# Altium PCB sigjumper-top.PcbDoc (part 5 of 5)
Units mil, origin at the board's own origin, x right, y up, seen from the top; angles counter-clockwise.
Board outline 7874.02 x 2559.06 mil, 14 copper layers (TOP, P1(GND), S1(V), P2(GND), S2(H), P3(GND), S3(V12/V2V5), S4(VDDR), P4(GND), S5(V), P5(GND), S6(H), P6(GND), BOT), stack 115.1 mil thick; 22 components, 186 nets, 824 pads, 732 vias.
Unrouted connection lines stored in the file: 341.
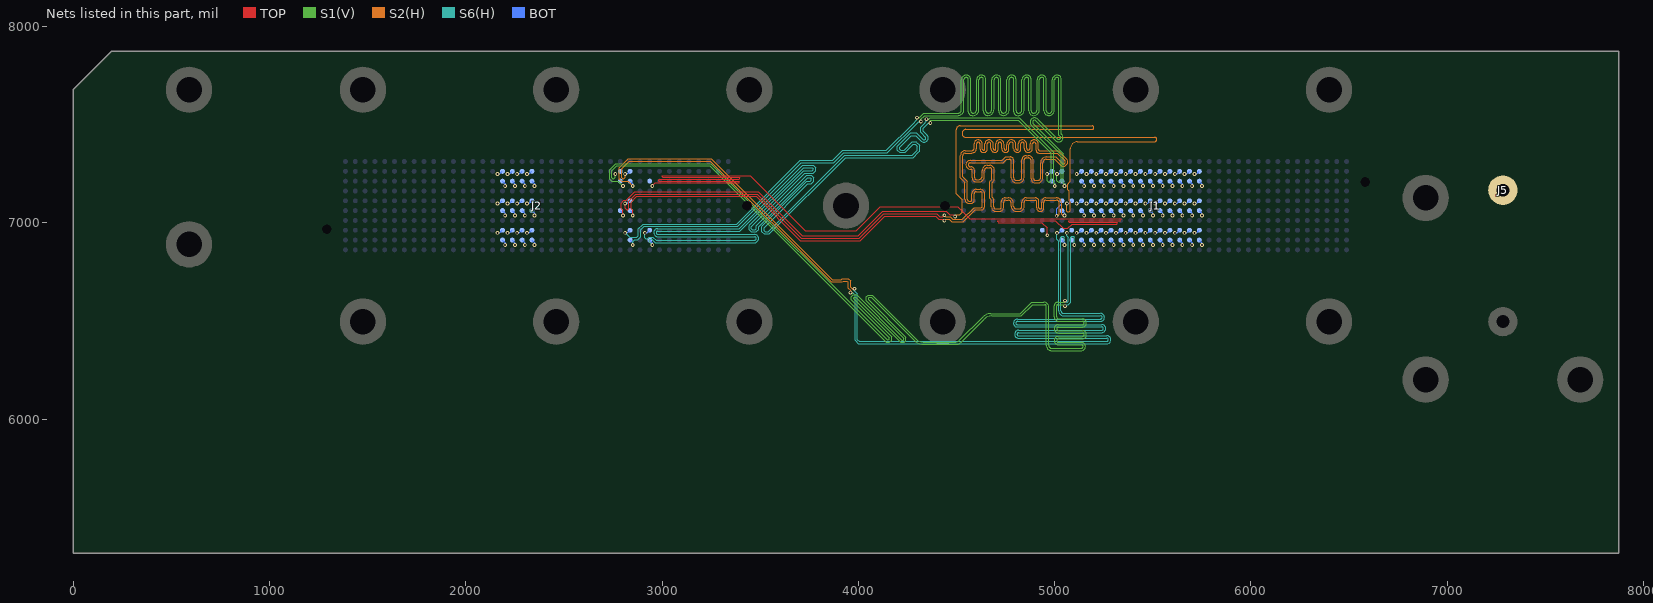
[diagram p17: the nets of this part, all layers, seen from the top]

## Via types
v1: diameter 19, hole 10, TOP to BOT, tented both sides, 732 vias

## Nets (pads, with @x,y where several pads share a name; then routed paths per layer and width w, separated by ;. In a path a pad name is that pad's centre, name@x,y a point inside that pad or via, vN(x,y) a via of type N, cw(c..) or ccw(c..) an arc to the next point about the centre after c; other vN are vias at no path point) (continued)
IL1.SDR.G13.D0_P: J1.285 J2.285 | length 5760.8
  TOP w4: v1(2800.7,7036.61) 2800.7,7061.3 2792,7070 2792,7100.13 2805.7,7113.83 2816.89,7113.83 2861.06,7158 3489.88,7158 3704.88,6943 3714.88,6933 3999.97,6933 4009.97,6943 4124.97,7058 4447,7058 4465,7040 4485,7040 v1(4493,7032)
  S2(H) w4: v1(4493,7032) 4501,7040 4516.97,7040 4530,7053.03 4530,7116.97 4498.49,7148.49 4498.49,7473.42 cw(c4518.06,7473.42) 4518.06,7493 5192,7493 cw(c5192,7485) 5200,7485 cw(c5190,7485) 5190,7475 4548,7475 ccw(c4548,7455) 4528,7455 ccw(c4548,7455) 4548,7435 5510,7435 cw(c5510,7425) 5520,7425 cw(c5507,7425) 5507,7412 5115,7412 ccw(c5115,7377) 5080,7377 5080,7210.06 5066.49,7196.54 5066.49,7168.51 5070,7165 5073,7162 5073,7111.8 5080,7104.8 5080,7060 5075,7055 5065,7055 5061.81,7058.19 v1(5061.81,7098.11)
  BOT w4: J2.285@2787.21,7061.61 2800.71,7048.11 v1(2800.7,7036.61) ; v1(5061.81,7098.11) 5073.31,7098.11 J1.285@5086.81,7111.61
IL1.SDR.G13.D1_N: J1.289 J2.289 | length 5734
  S1(V) w4: v1(2762.2,7248.11) 2762.2,7232.2 2755,7225 2750,7225 2745,7230 2745,7265 2769,7289 3239.94,7289 3244.03,7289 4142.03,6391 4158,6391 4169,6402 4169,6419.14 3975.43,6612.71 3975.43,6616.95 3979.48,6621 3985.53,6621 4216.12,6390.41 4233.13,6390.41 4242.28,6399.56 4242.28,6416.57 ; 4242.28,6416.57 4052.2,6606.65 4052.2,6616.55 4055.03,6619.38 4064.93,6619.38 4286.14,6398.17 ccw(c4330,6442.02) 4330,6380 4495.69,6380 ccw(c4495.69,6419.31) 4523.49,6391.51 4640.69,6508.72 cw(c4680,6469.4) 4680,6525 4830,6525 4888,6583 4949.97,6583 cw(c4949.97,6574.97) 4958,6574.97 4958,6375 ccw(c4985,6375) 4985,6348 5135,6348 ccw(c5135,6370) 5157,6370 ccw(c5137,6370) 5137,6390 5020,6390 cw(c5020,6400) 5010,6400 cw(c5018,6400) 5018,6408 5140,6408 ccw(c5140,6430) 5162,6430 ccw(c5142,6430) 5142,6450 5020,6450 cw(c5020,6460) 5010,6460 cw(c5018,6460) 5018,6468 5140,6468 ccw(c5140,6490) 5162,6490 ccw(c5142,6490) 5142,6510 5020,6510 cw(c5020,6520) 5010,6520 5010,6578 cw(c5015,6578) 5015,6583 5044.54,6583 v1(5053,6574.54)
  S6(H) w4: v1(5053,6574.54) 5061,6582.54 5069.51,6582.54 5082.12,6595.15 5082.12,6924.73 5087.12,6929.73 5097.12,6929.73 5100.31,6926.54 v1(5100.31,6886.61)
IL1.SDR.G13.D1_P: J1.288 J2.288 | length 5750.1
  S1(V) w4: v1(2800.7,7186.61) 2777.32,7210 2745,7210 2733,7222 2733,7269.97 2764.03,7301 3244.91,7301 3249,7301 4147,6403 4153,6403 4157,6407 4157,6414.17 3963.43,6607.74 3963.43,6621.92 3974,6632.49 3974.51,6633 3990.5,6633 3991.01,6632.49 4221.09,6402.41 4228.16,6402.41 4230.28,6404.53 4230.28,6411.6 4040.2,6601.68 4040.2,6616.55 4040.2,6621.52 4050.06,6631.38 4069.9,6631.38 4294.63,6406.65 ccw(c4330,6442.02) 4330,6392 4495.69,6392 ccw(c4495.69,6419.31) 4514.99,6399.99 4635.72,6520.72 cw(c4675.03,6481.4) 4675.03,6537 4825.03,6537 4883.03,6595 4945,6595 cw(c4945,6570) 4970,6570 4970,6375 ccw(c4985,6375) 4985,6360 5135,6360 ccw(c5135,6370) 5145,6370 ccw(c5137,6370) 5137,6378 5020,6378 cw(c5020,6400) 4998,6400 cw(c5018,6400) 5018,6420 5140,6420 ccw(c5140,6430) 5150,6430 ccw(c5142,6430) 5142,6438 5020,6438 cw(c5020,6460) 4998,6460 cw(c5018,6460) 5018,6480 5140,6480 ccw(c5140,6490) 5150,6490 ccw(c5142,6490) 5142,6498 5020,6498 cw(c5020,6520) 4998,6520 4998,6578 cw(c5015,6578) 5015,6595 5045.46,6595 v1(5053,6602.54)
  S6(H) w4: v1(5053,6602.54) 5061,6594.54 5064.54,6594.54 5070.12,6600.12 5070.12,6924.88 5061.81,6933.19 v1(5061.81,6948.11)
IL1.SDR.G13.D2_N: J1.293 J2.293 | length 5810.6
  S1(V) w4: v1(4298.49,7534.8) 4309.8,7534.8 4333,7558 4508,7558 ccw(c4508,7575) 4525,7575 4525,7727 cw(c4550,7727) 4550,7752 cw(c4550,7730) 4572,7730 4572,7571 ccw(c4585,7571) 4585,7558 ccw(c4585,7575) 4602,7575 4602,7727 cw(c4627,7727) 4627,7752 cw(c4627,7730) 4649,7730 4649,7571 ccw(c4662,7571) 4662,7558 ccw(c4662,7575) 4679,7575 4679,7727 cw(c4704,7727) 4704,7752 cw(c4704,7730) 4726,7730 4726,7571 ccw(c4739,7571) 4739,7558 ccw(c4739,7575) 4756,7575 4756,7727 cw(c4781,7727) 4781,7752 cw(c4781,7730) 4803,7730 4803,7571 ccw(c4816,7571) 4816,7558 ccw(c4816,7575) 4833,7575 4833,7727 cw(c4858,7727) 4858,7752 cw(c4858,7730) 4880,7730 4880,7571 ccw(c4893,7571) 4893,7558 ccw(c4893,7575) 4910,7575 4910,7727 cw(c4935,7727) 4935,7752 cw(c4935,7730) 4957,7730 4957,7571 ccw(c4970,7571) 4970,7558 4971.87,7558 ccw(c4971.87,7573.13) 4987,7573.13 4987,7727 cw(c5012,7727) 5012,7752 cw(c5012,7730) 5034,7730 5034,7451.51 5036.11,7449.4 cw(c5020.56,7433.84) 5036.11,7418.28 cw(c5020.56,7433.84) 5005,7418.28 4904.14,7519.14 ccw(c4897.07,7512.07) 4890,7519.14 ccw(c4897.07,7512.07) 4890,7505 5044.29,7350.71 5044.29,7204.14 5050.31,7198.11 v1(5050.31,7186.61)
  S6(H) w4: v1(2812.2,6948.11) 2835.59,6924.73 2871.76,6924.73 2880,6932.97 2880,6967.97 2901.51,6989.49 2905.03,6993 3380,6993 3704,7317 3869.12,7317 3920.12,7368 4143,7368 4279,7504 4298.49,7523.49 v1(4298.49,7534.8)
  BOT w4: v1(2812.2,6948.11) 2823.71,6948.11 J2.293@2837.21,6961.61 ; J1.293@5036.81,7211.61 5050.31,7198.11 v1(5050.31,7186.61)
IL1.SDR.G13.D2_P: J1.292 J2.292 | length 5803.3
  S1(V) w4: v1(4318.28,7515) 4318.28,7526.31 4337.97,7546 4508,7546 ccw(c4508,7575) 4537,7575 4537,7727 cw(c4550,7727) 4550,7740 cw(c4550,7730) 4560,7730 4560,7566.03 ccw(c4580.03,7566.03) 4580.03,7546 4585,7546 ccw(c4585,7575) 4614,7575 4614,7727 cw(c4627,7727) 4627,7740 cw(c4627,7730) 4637,7730 4637,7569 ccw(c4660,7569) 4660,7546 ccw(c4660,7577) 4691,7577 4691,7727 cw(c4704,7727) 4704,7740 cw(c4704,7730) 4714,7730 4714,7571 ccw(c4739,7571) 4739,7546 ccw(c4739,7575) 4768,7575 4768,7727 cw(c4781,7727) 4781,7740 cw(c4781,7730) 4791,7730 4791,7566.03 ccw(c4811.03,7566.03) 4811.03,7546 4816,7546 ccw(c4816,7575) 4845,7575 4845,7727 cw(c4858,7727) 4858,7740 cw(c4858,7730) 4868,7730 4868,7571 ccw(c4893,7571) 4893,7546 ccw(c4893,7575) 4922,7575 4922,7727 cw(c4935,7727) 4935,7740 cw(c4935,7730) 4945,7730 4945,7571 ccw(c4970,7571) 4970,7546 4971.82,7546 ccw(c4971.82,7573.18) 4999,7573.18 4999,7727 cw(c5012,7727) 5012,7740 cw(c5012,7730) 5022,7730 5022,7446.54 5027.63,7440.91 cw(c5020.56,7433.84) 5027.63,7426.77 cw(c5020.56,7433.84) 5013.49,7426.77 4912.63,7527.63 ccw(c4897.07,7512.07) 4881.51,7527.63 ccw(c4897.07,7512.07) 4881.51,7496.51 5032.29,7345.74 5032.29,7209.29 5028,7205 5020,7205 5011.81,7213.19 v1(5011.81,7248.11)
  S6(H) w4: v1(2850.7,6886.61) 2850.7,6902.52 2860.91,6912.73 2876.73,6912.73 2892,6928 2892,6963 2910,6981 3384.97,6981 3708.97,7305 3874.09,7305 3892.04,7322.96 3918.06,7348.97 3925.09,7356 4147.97,7356 4306.97,7515 v1(4318.28,7515)
  BOT w4: J2.292@2837.21,6911.61 2850.71,6898.11 v1(2850.7,6886.61) ; v1(5011.81,7248.11) 5023.31,7248.11 J1.292@5036.81,7261.61
IL1.SDR.G13.D3_N: J1.296 J2.296 | length 5765.5
  TOP w4: v1(2812.2,7098.11) 2812.2,7072.8 2820,7065 2825,7065 2830,7070 2830,7109.97 2866.03,7146 3484.91,7146 3699.91,6931 3709.91,6921 4004.94,6921 4014.94,6931 4128.94,7045 4400,7045 4415,7030 4430,7030 v1(4438,7038)
  S2(H) w4: v1(4438,7038) 4446,7030 4466.97,7030 4480.68,7016.29 4529.32,7016.29 4590.03,7077 4625,7077 ccw(c4625,7083) 4631,7083 4631,7148 ccw(c4621,7148) 4621,7158 4600,7158 ccw(c4600,7148) 4590,7148 4590,7115 cw(c4573,7115) 4573,7098 4565,7098 cw(c4565,7120) 4543,7120 4543,7205 4520,7228 4520,7342 cw(c4545,7342) 4545,7367 4577,7367 ccw(c4577,7380) 4590,7380 4590,7402 cw(c4610,7402) 4610,7422 cw(c4610,7400) 4632,7400 4632,7375 ccw(c4637,7375) 4637,7370 4640,7370 ccw(c4640,7375) 4645,7375 4645,7402 cw(c4665,7402) 4665,7422 cw(c4665,7400) 4687,7400 4687,7378 ccw(c4695,7378) 4695,7370 ccw(c4695,7375) 4700,7375 4700,7402 cw(c4720,7402) 4720,7422 cw(c4720,7400) 4742,7400 4742,7378 ccw(c4750,7378) 4750,7370 ccw(c4750,7375) 4755,7375 4755,7397 cw(c4780,7397) 4780,7422 cw(c4780,7400) 4802,7400 4802,7378 ccw(c4810,7378) 4810,7370 ccw(c4810,7375) 4815,7375 4815,7402 cw(c4835,7402) 4835,7422 cw(c4835,7400) 4857,7400 4857,7378 ccw(c4865,7378) 4865,7370 ccw(c4865,7380) 4875,7380 4875,7402 cw(c4895,7402) 4895,7422 cw(c4895,7400) 4917,7400 4917,7373.48 ccw(c4923.48,7373.48) 4923.48,7367 5017.97,7367 5059.49,7325.49 ; v1(5050.31,7036.61) 5041.39,7036.61 5035,7043 5035,7100 ccw(c5008,7100) 5008,7127 4955,7127 ccw(c4955,7105) 4933,7105 4933,7075 cw(c4928,7075) 4928,7070 4925,7070 cw(c4925,7075) 4920,7075 4920,7107 ccw(c4900,7107) 4900,7127 4855,7127 ccw(c4855,7105) 4833,7105 4833,7083 cw(c4820,7083) 4820,7070 4805,7070 cw(c4805,7085) 4790,7085 4790,7100 ccw(c4763,7100) 4763,7127 4749.06,7127 ccw(c4749.06,7105.94) 4728,7105.94 4728,7078 cw(c4720,7078) 4720,7070 4700,7070 cw(c4700,7080) 4690,7080 4690,7120 4680.99,7129.01 4680.99,7204.01 4692,7215.03 4692,7270 ccw(c4670,7270) 4670,7292 4657,7292 ccw(c4657,7265) 4630,7265 4630,7235 cw(c4615,7235) 4615,7220 4600,7220 cw(c4600,7228) 4592,7228 4592,7265 ccw(c4572,7265) 4572,7285 4570,7285 cw(c4570,7295) 4560,7295 cw(c4570,7295) 4570,7305 4737,7305 4755,7323 4769,7323 cw(c4769,7313) 4779,7313 4779,7230 ccw(c4806,7230) 4806,7203 4815,7203 ccw(c4815,7233) 4845,7233 4845,7320 cw(c4855,7320) 4855,7330 4865,7330 cw(c4865,7315) 4880,7315 4880,7225 ccw(c4902,7225) 4902,7203 4915,7203 ccw(c4915,7228) 4940,7228 4940,7305 cw(c4958,7305) 4958,7323 4999.77,7323 5028.89,7293.89 ccw(c5044.44,7309.44) 5060,7293.89 ccw(c5044.44,7309.44) 5060,7325
  BOT w4: v1(2812.2,7098.11) 2823.71,7098.11 J2.296@2837.21,7111.61 ; J1.296@5036.81,7061.61 5050.31,7048.11 v1(5050.31,7036.61)
IL1.SDR.G13.D3_P: J1.295 J2.295 | length 5774.6
  TOP w4: v1(2850.7,7036.61) 2850.7,7061.3 2842,7070 2842,7105 2871,7134 3479.94,7134 3694.94,6919 3704.94,6909 4009.91,6909 4019.91,6919 4133.91,7033 4395.03,7033 4410.03,7018 4430,7018 v1(4438,7010)
  S2(H) w4: v1(4438,7010) 4446,7018 4462,7018 4470,7010 4475.71,7004.29 4534.29,7004.29 4595,7065 4625,7065 ccw(c4625,7083) 4643,7083 4643,7148 ccw(c4621,7148) 4621,7170 4600,7170 ccw(c4600,7148) 4578,7148 4578,7115 cw(c4573,7115) 4573,7110 4565,7110 cw(c4565,7120) 4555,7120 4555,7209.97 4532,7232.97 4532,7342 cw(c4545,7342) 4545,7355 4577,7355 ccw(c4577,7380) 4602,7380 4602,7402 cw(c4610,7402) 4610,7410 cw(c4610,7400) 4620,7400 4620,7375 ccw(c4637,7375) 4637,7358 4640,7358 ccw(c4640,7375) 4657,7375 4657,7402 cw(c4665,7402) 4665,7410 cw(c4665,7400) 4675,7400 4675,7378 ccw(c4695,7378) 4695,7358 ccw(c4695,7375) 4712,7375 4712,7402 cw(c4720,7402) 4720,7410 cw(c4720,7400) 4730,7400 4730,7378 ccw(c4750,7378) 4750,7358 ccw(c4750,7375) 4767,7375 4767,7397 cw(c4780,7397) 4780,7410 cw(c4780,7400) 4790,7400 4790,7378 ccw(c4810,7378) 4810,7358 ccw(c4810,7375) 4827,7375 4827,7402 cw(c4835,7402) 4835,7410 cw(c4835,7400) 4845,7400 4845,7378 ccw(c4865,7378) 4865,7358 ccw(c4865,7380) 4887,7380 4887,7402 cw(c4895,7402) 4895,7410 cw(c4895,7400) 4905,7400 4905,7368.51 ccw(c4918.51,7368.51) 4918.51,7355 5013,7355 5051,7317 ; v1(5010,7035) 5015,7035 5023,7043 5023,7100 ccw(c5008,7100) 5008,7115 4955,7115 ccw(c4955,7105) 4945,7105 4945,7075 cw(c4928,7075) 4928,7058 4925,7058 cw(c4925,7075) 4908,7075 4908,7107 ccw(c4900,7107) 4900,7115 4855,7115 ccw(c4855,7105) 4845,7105 4845,7083 cw(c4820,7083) 4820,7058 4805,7058 cw(c4805,7085) 4778,7085 4778,7100 ccw(c4763,7100) 4763,7115 4750.04,7115 ccw(c4750.04,7104.96) 4740,7104.96 4740,7078 cw(c4720,7078) 4720,7058 4700,7058 cw(c4700,7080) 4678,7080 4678,7115.03 4668.99,7124.04 4668.99,7208.99 4672.5,7212.5 4680,7220 4680,7270 ccw(c4670,7270) 4670,7280 4657,7280 ccw(c4657,7265) 4642,7265 4642,7235 cw(c4615,7235) 4615,7208 4600,7208 cw(c4600,7228) 4580,7228 4580,7265 ccw(c4572,7265) 4572,7273 4570,7273 cw(c4570,7295) 4548,7295 cw(c4570,7295) 4570,7317 4732.03,7317 4750.03,7335 4773.97,7335 cw(c4773.97,7317.97) 4791,7317.97 4791,7230 ccw(c4806,7230) 4806,7215 4815,7215 ccw(c4815,7233) 4833,7233 4833,7320 cw(c4855,7320) 4855,7342 4865,7342 cw(c4865,7315) 4892,7315 4892,7225 ccw(c4902,7225) 4902,7215 4915,7215 ccw(c4915,7228) 4928,7228 4928,7305 cw(c4958,7305) 4958,7335 5004.75,7335 5037.37,7302.37 ccw(c5044.44,7309.44) 5051.51,7302.37 ccw(c5044.44,7309.44) 5051.51,7316.51
  BOT w4: J2.295@2837.21,7061.61 2850.71,7048.11 v1(2850.7,7036.61) ; v1(5010,7035) 5010,7069.88 5036.81,7096.69 J1.295@5036.81,7111.61
IL1.SDR.G13.D4_N: J1.299 J2.299 | length 5797.5
  S2(H) w4: v1(2812.2,7248.11) 2812.2,7232.2 2805,7225 2800,7225 2795,7230 2795,7275 2833.29,7313.29 3246.71,7313.29 3861.73,6698.27 3919.05,6698.27 3923.49,6702.71 3943.56,6702.71 3948,6698.27 3948,6667 3960,6655 v1(3960,6643.69)
  S6(H) w4: v1@3956.31,6648.69 v1@3961.31,6643.69 ; v1(3960,6643.69) v1@3961.31,6643.69 ; v1(5050.31,6886.61) 5049,6887.92 5049,6925 5044.27,6929.73 5037.12,6929.73 5032.12,6924.73 5032.12,6550.88 ccw(c5045,6550.88) 5045,6538 5233,6538 ; 5234,6538 cw(c5234,6518) 5254,6518 cw(c5233,6518) 5233,6497 4811,6497 ccw(c4811,6488) 4802,6488 ccw(c4809,6488) 4809,6481 5239,6481 ; 5240,6481 cw(c5240,6461) 5260,6461 cw(c5239,6461) 5239,6440 4817,6440 ccw(c4817,6431) 4808,6431 ccw(c4815,6431) 4815,6424 5266,6424 cw(c5266,6404) 5286,6404 cw(c5265,6404) 5265,6383 4000.03,6383 3983,6400.03 3983,6632 3971.31,6643.69 v1@3961.31,6643.69
  BOT w4: v1(2812.2,7248.11) 2823.71,7248.11 J2.299@2837.21,7261.61 ; J1.299@5036.81,6911.61 5050.31,6898.11 v1(5050.31,6886.61)
IL1.SDR.G13.D4_P: J1.298 J2.298 | length 5810.7
  S2(H) w4: v1(2850.7,7186.61) 2827.32,7210 2795,7210 2783,7222 2783,7279.97 2828.32,7325.29 3251.68,7325.29 3866.7,6710.27 3914.08,6710.27 3918.52,6714.71 3948.53,6714.71 3960,6703.24 3960,6671.97 3968.49,6663.49 v1(3979.8,6663.49)
  S6(H) w4: v1(3979.8,6663.49) 3979.8,6652.17 3995,6636.97 3995,6405 4005,6395 5265,6395 ccw(c5265,6404) 5274,6404 ccw(c5266,6404) 5266,6412 4815,6412 cw(c4815,6431) 4796,6431 cw(c4817,6431) 4817,6452 5239,6452 ccw(c5239,6461) 5248,6461 ccw(c5240,6461) 5240,6469 ; v1(5011.81,6948.11) 5011.81,6915.04 5020.12,6906.73 5020.12,6550.88 ccw(c5045,6550.88) 5045,6526 5233,6526 ; 5234,6526 cw(c5234,6518) 5242,6518 cw(c5233,6518) 5233,6509 4811,6509 ccw(c4811,6488) 4790,6488 ccw(c4809,6488) 4809,6469 5239,6469
  BOT w4: J2.298@2837.21,7211.61 2850.71,7198.11 v1(2850.7,7186.61) ; v1(5011.81,6948.11) 5023.31,6948.11 J1.298@5036.81,6961.61
IL1.SDR.G13.D5_N: J1.303 J2.313 | length 5818.7
  S1(V) w4: v1(4347,7527.31) 4358.31,7527.31 4365,7534 4819.03,7534 4994.29,7358.74 4994.29,7204.14 5000.31,7198.11 v1(5000.31,7186.61)
  S6(H) w4: v1(2912.2,6948.11) 2912.2,6922.8 2916.51,6918.49 2926.51,6918.49 2935.03,6927 2953,6927 2970,6910 3470,6910 ccw(c3470,6920) 3480,6920 ccw(c3472,6920) 3472,6928 2980,6928 cw(c2980,6950) 2958,6950 cw(c2977,6950) 2977,6969 3392.03,6969 3563.78,7140.75 3716.03,7293 3769.97,7293 3782,7280.97 3782,7265.03 3769.97,7253 3728,7253 3455,6980 3455,6970 3460,6965 3475,6965 3480,6970 3480,6984.97 3737.03,7242 3759.97,7242 3772,7229.97 3772,7210.03 3759.97,7198 3743,7198 3520,6975 3520,6960 3525,6955 3541.06,6955 3930.06,7344 4274,7344 4300,7370 4300,7390 4290,7400 4280,7400 4238,7358 4210.03,7358 4198,7370.03 4198,7389.06 4265.94,7457 4295.57,7457 4327.37,7425.2 ccw(c4334.44,7432.27) 4341.51,7425.2 ccw(c4335.86,7430.86) 4341.51,7436.51 4318,7460.03 4318,7487 4335.5,7504.5 4347,7516 v1(4347,7527.31)
  BOT w4: v1(2912.2,6948.11) 2923.71,6948.11 J2.313@2937.21,6961.61 ; J1.303@4986.81,7211.61 5000.32,7198.11 v1(5000.31,7186.61)
IL1.SDR.G13.D5_P: J1.302 J2.312 | length 5809.8
  S1(V) w4: v1(4366.8,7507.51) 4366.8,7518.83 4369.97,7522 4814.06,7522 4982.29,7353.77 4982.29,7209.28 4978,7205 4970,7205 4961.81,7213.19 v1(4961.81,7248.11)
  S6(H) w4: v1(2950.7,6886.61) 2935,6902.32 2935,6910 2940,6915 2948.03,6915 2965.03,6898 3470,6898 ccw(c3470,6920) 3492,6920 ccw(c3472,6920) 3472,6940 2980,6940 cw(c2980,6950) 2970,6950 cw(c2977,6950) 2977,6957 3397,6957 3721,7281 3765,7281 3770,7276 3770,7270 3765,7265 3723.03,7265 3446.51,6988.49 3443,6984.97 3443,6965.03 3451.51,6956.51 3455.03,6953 3479.97,6953 3488.49,6961.51 3492,6965.03 3492,6980 3742,7230 3755,7230 3760,7225 3760,7215 3755,7210 3738.03,7210 3511.51,6983.49 3508,6979.97 3508,6955.03 3520.03,6943 3546.03,6943 3935.03,7332 4278.97,7332 4308.49,7361.51 4312,7365.03 4312,7394.97 4308.49,7398.49 4298.49,7408.49 4294.97,7412 4275.03,7412 4233.03,7370 4215,7370 4210,7375 4210,7384.09 4269.91,7444 4291.6,7444 4318.89,7416.72 ccw(c4334.44,7432.27) 4350,7416.72 ccw(c4335.86,7430.86) 4350,7445 4330,7465 4330,7482.03 4355.49,7507.51 v1(4366.8,7507.51)
  BOT w4: J2.312@2937.21,6911.61 2950.71,6898.11 v1(2950.7,6886.61) ; v1(4961.81,7248.11) 4973.32,7248.11 J1.302@4986.81,7261.61
IL1.SDR.G13.D6: J1.318 J2.318 | length 5700.8
  TOP w4: v1(2950.7,7186.61) 2966.42,7202.33 3391.3,7202.33 3393.7,7204.72 3393.7,7208.66 3390.75,7211.61 2984.25,7211.61 2982.28,7213.58 2982.28,7218.19 2985.55,7221.46 3391.73,7221.46 3394.69,7224.41 3394.69,7229.33 3392.72,7231.3 3004.61,7231.3 3001.97,7233.94 3001.97,7237.88 3004.36,7240.27 3449.73,7240.27 3730.15,6959.85 3989.52,6959.85 4111.67,7082 4505,7082 4566.33,7020.67 4915.39,7020.67 4916.77,7019.29 5337.01,7019.29 5339.57,7016.73 5339.57,7013.78 5336.61,7010.83 5073.82,7010.83 5071.85,7008.86 5071.85,7003.94 5073.82,7001.97 5316.93,7001.97 5318.9,7000 5318.9,6995.08 5316.93,6993.11 5088.58,6993.11 5065.94,6970.47 5043.31,6970.47 5002.95,7010.83 4711.61,7010.83 4709.65,7008.86 4709.65,7003.94 4712.6,7000.98 4934.06,7000.98 4961.61,6973.43 4961.61,6935.04 v1(4962.6,6936.02)
JTAG.TCK: J1.215 | length 30.6
  BOT w4: v1(5411.81,7098.11) 5423.31,7098.11 J1.215@5436.81,7111.61
JTAG.TDI: J1.212 | length 30.6
  BOT w4: v1(5411.81,7248.11) 5423.31,7248.11 J1.212@5436.81,7261.61
JTAG.TDO: J1.216 | length 30.6
  BOT w4: J1.216@5436.81,7061.61 5450.31,7048.11 v1(5450.31,7036.61)
JTAG.TMS: J1.213 | length 30.6
  BOT w4: J1.213@5436.81,7211.61 5450.31,7198.11 v1(5450.31,7186.61)
MCLK.C_N: J1.219 | length 30.6
  BOT w3.5: J1.219@5436.81,6911.61 5450.31,6898.11 v1(5450.31,6886.61)
MCLK.C_P: J1.218 | length 30.6
  BOT w3.5: v1(5411.81,6948.11) 5423.31,6948.11 J1.218@5436.81,6961.61
MIB33I.S0: J1.253 | length 30.6
  BOT w4: J1.253@5236.81,7211.61 5250.31,7198.11 v1(5250.31,7186.61)
MIB33I.S1: J1.252 | length 30.6
  BOT w4: v1(5211.81,7248.11) 5223.31,7248.11 J1.252@5236.81,7261.61
MIB33I.S2: J1.256 | length 30.6
  BOT w4: J1.256@5236.81,7061.61 5250.31,7048.11 v1(5250.31,7036.61)
MIB33I.S3: J1.255 | length 30.6
  BOT w4: v1(5211.81,7098.11) 5223.31,7098.11 J1.255@5236.81,7111.61
MIB33I.S4: J1.259 | length 30.6
  BOT w4: J1.259@5236.81,6911.61 5250.31,6898.11 v1(5250.31,6886.61)
MIB33I.S5: J1.258 | length 30.6
  BOT w4: v1(5211.81,6948.11) 5223.31,6948.11 J1.258@5236.81,6961.61
MIB33I.S6: J1.263 | length 30.6
  BOT w4: J1.263@5186.81,7211.61 5200.31,7198.11 v1(5200.31,7186.61)
MIB33I.S7: J1.262 | length 30.6
  BOT w4: v1(5161.81,7248.11) 5173.31,7248.11 J1.262@5186.81,7261.61
MIB33I.S8: J1.266 | length 30.6
  BOT w4: J1.266@5186.81,7061.61 5200.31,7048.11 v1(5200.31,7036.61)
MIB33I.S9: J1.265 | length 30.6
  BOT w4: v1(5161.81,7098.11) 5173.31,7098.11 J1.265@5186.81,7111.61
MIB33I.S10: J1.269 | length 30.6
  BOT w4: J1.269@5186.81,6911.61 5200.31,6898.11 v1(5200.31,6886.61)
MIB33I.S11: J1.268 | length 30.6
  BOT w4: v1(5161.81,6948.11) 5173.31,6948.11 J1.268@5186.81,6961.61
MIB33I.S12: J1.273 | length 30.6
  BOT w4: J1.273@5136.81,7211.61 5150.31,7198.11 v1(5150.31,7186.61)
MIB33I.S13: J1.272 | length 30.6
  BOT w4: v1(5111.81,7248.11) 5123.31,7248.11 J1.272@5136.81,7261.61
MIB33I.S14: J1.276 | length 30.6
  BOT w4: J1.276@5136.81,7061.61 5150.31,7048.11 v1(5150.31,7036.61)
MIB33I.S15: J1.275 | length 30.6
  BOT w4: v1(5111.81,7098.11) 5123.31,7098.11 J1.275@5136.81,7111.61
MIB33I.S16: J1.279 | length 30.6
  BOT w4: J1.279@5136.81,6911.61 5150.31,6898.11 v1(5150.31,6886.61)
MIB33I.S17: J1.278 | length 30.6
  BOT w4: v1(5111.81,6948.11) 5123.31,6948.11 J1.278@5136.81,6961.61
MIB33I.S18: J1.203 | length 30.6
  BOT w4: J1.203@5486.81,7211.61 5500.31,7198.11 v1(5500.31,7186.61)
MIB33I.S19: J1.202 | length 30.6
  BOT w4: v1(5461.81,7248.11) 5473.31,7248.11 J1.202@5486.81,7261.61
MIB33I.S20: J1.206 | length 30.6
  BOT w4: J1.206@5486.81,7061.61 5500.31,7048.11 v1(5500.31,7036.61)
MIB33I.S21: J1.205 | length 30.6
  BOT w4: v1(5461.81,7098.11) 5473.31,7098.11 J1.205@5486.81,7111.61
MIB33I.S22: J1.209 | length 30.6
  BOT w4: J1.209@5486.81,6911.61 5500.31,6898.11 v1(5500.31,6886.61)
MIB33I.S23: J1.208 | length 30.6
  BOT w4: v1(5461.81,6948.11) 5473.31,6948.11 J1.208@5486.81,6961.61
MIB33I.S24: J1.153 | length 30.6
  BOT w4: J1.153@5736.81,7211.61 5750.32,7198.11 v1(5750.31,7186.61)
MIB33I.S25: J1.152 | length 30.6
  BOT w4: v1(5711.81,7248.11) 5723.32,7248.11 J1.152@5736.81,7261.61
MIB33I.S26: J1.156 | length 30.6
  BOT w4: J1.156@5736.81,7061.61 5750.32,7048.11 v1(5750.31,7036.61)
MIB33I.S27: J1.155 | length 30.6
  BOT w4: v1(5711.81,7098.11) 5723.32,7098.11 J1.155@5736.81,7111.61
MIB33I.S28: J1.159 | length 30.6
  BOT w4: J1.159@5736.81,6911.61 5750.32,6898.11 v1(5750.31,6886.61)
MIB33I.S29: J1.158 | length 30.6
  BOT w4: v1(5711.81,6948.11) 5723.32,6948.11 J1.158@5736.81,6961.61
PROG_N: J1.222 | length 30.6
  BOT w4: v1(5361.81,7248.11) 5373.31,7248.11 J1.222@5386.81,7261.61
RSTI_N: J1.223 | length 30.6
  BOT w4: J1.223@5386.81,7211.61 5400.31,7198.11 v1(5400.31,7186.61)
V48BB: J1.225 J1.226 J1.228 J1.229 J1.232 J1.233 J1.235 J1.236 J1.238 J1.239 J1.242 J1.243 J1.245 J1.246 J1.248 J1.249 J5.1 | length 489.5
  BOT w4: v1(5261.81,6948.11) 5273.31,6948.11 J1.248@5286.81,6961.61 ; v1(5261.81,7098.11) 5273.31,7098.11 J1.245@5286.81,7111.61 ; v1(5261.81,7248.11) 5273.31,7248.11 J1.242@5286.81,7261.61 ; J1.249@5286.81,6911.61 5300.31,6898.11 v1(5300.31,6886.61) ; J1.246@5286.81,7061.61 5300.31,7048.11 v1(5300.31,7036.61) ; J1.243@5286.81,7211.61 5300.31,7198.11 v1(5300.31,7186.61) ; v1(5311.81,6948.11) 5323.31,6948.11 J1.238@5336.81,6961.61 ; v1(5311.81,7098.11) 5323.31,7098.11 J1.235@5336.81,7111.61 ; v1(5311.81,7248.11) 5323.31,7248.11 J1.232@5336.81,7261.61 ; J1.239@5336.81,6911.61 5350.31,6898.11 v1(5350.31,6886.61) ; J1.236@5336.81,7061.61 5350.31,7048.11 v1(5350.31,7036.61) ; J1.233@5336.81,7211.61 5350.31,7198.11 v1(5350.31,7186.61) ; v1(5361.81,6948.11) 5373.31,6948.11 J1.228@5386.81,6961.61 ; v1(5361.81,7098.11) 5373.31,7098.11 J1.225@5386.81,7111.61 ; J1.229@5386.81,6911.61 5400.31,6898.11 v1(5400.31,6886.61) ; J1.226@5386.81,7061.61 5400.31,7048.11 v1(5400.31,7036.61)
VIOREF_L_T: J2.175 J2.176 J2.178 J2.179 J2.182 J2.183 J2.185 J2.186 J2.188 J2.189 J2.192 J2.193 J2.195 J2.196 J2.198 J2.199 | length 489.5
  BOT w4: v1(2212.2,7098.11) 2223.71,7098.11 J2.176@2237.21,7111.61 ; v1(2212.2,7248.11) 2223.71,7248.11 J2.179@2237.21,7261.61 ; J2.175@2237.21,7061.61 2250.71,7048.11 v1(2250.7,7036.61) ; J2.178@2237.21,7211.61 2250.71,7198.11 v1(2250.7,7186.61) ; v1(2262.2,6948.11) 2273.71,6948.11 J2.183@2287.21,6961.61 ; v1(2262.2,7098.11) 2273.71,7098.11 J2.186@2287.21,7111.61 ; v1(2262.2,7248.11) 2273.71,7248.11 J2.189@2287.21,7261.61 ; J2.182@2287.21,6911.61 2300.71,6898.11 v1(2300.7,6886.61) ; J2.185@2287.21,7061.61 2300.71,7048.11 v1(2300.7,7036.61) ; J2.188@2287.21,7211.61 2300.71,7198.11 v1(2300.7,7186.61) ; v1(2312.2,6948.11) 2323.71,6948.11 J2.193@2337.21,6961.61 ; v1(2312.2,7098.11) 2323.71,7098.11 J2.196@2337.21,7111.61 ; v1(2312.2,7248.11) 2323.71,7248.11 J2.199@2337.21,7261.61 ; J2.192@2337.21,6911.61 2350.71,6898.11 v1(2350.7,6886.61) ; J2.195@2337.21,7061.61 2350.71,7048.11 v1(2350.7,7036.61) ; J2.198@2337.21,7211.61 2350.71,7198.11 v1(2350.7,7186.61)
VIOREF_R_T: J1.175 J1.176 J1.178 J1.179 J1.182 J1.183 J1.185 J1.186 J1.188 J1.189 J1.192 J1.193 J1.195 J1.196 J1.198 J1.199 | length 489.5
  BOT w4: v1(5511.81,6948.11) 5523.31,6948.11 J1.198@5536.81,6961.61 ; v1(5511.81,7098.11) 5523.31,7098.11 J1.195@5536.81,7111.61 ; v1(5511.81,7248.11) 5523.32,7248.11 J1.192@5536.81,7261.61 ; J1.199@5536.81,6911.61 5550.32,6898.11 v1(5550.31,6886.61) ; J1.196@5536.81,7061.61 5550.31,7048.11 v1(5550.31,7036.61) ; J1.193@5536.81,7211.61 5550.31,7198.12 v1(5550.31,7186.62) ; v1(5561.81,6948.12) 5573.31,6948.12 J1.188@5586.81,6961.61 ; v1(5561.81,7098.11) 5573.31,7098.11 J1.185@5586.81,7111.61 ; v1(5561.81,7248.11) 5573.31,7248.11 J1.182@5586.81,7261.61 ; J1.189@5586.81,6911.61 5600.32,6898.11 v1(5600.31,6886.61) ; J1.186@5586.81,7061.61 5600.31,7048.11 v1(5600.31,7036.61) ; J1.183@5586.81,7211.61 5600.31,7198.11 v1(5600.31,7186.61) ; v1(5611.81,6948.11) 5623.31,6948.11 J1.178@5636.81,6961.61 ; v1(5611.81,7098.11) 5623.31,7098.11 J1.175@5636.81,7111.61 ; J1.179@5636.81,6911.61 5650.32,6898.11 v1(5650.32,6886.61) ; J1.176@5636.81,7061.61 5650.31,7048.11 v1(5650.31,7036.61)
VTTREF_L_T: J2.162 J2.163 J2.165 J2.166 J2.168 J2.169 J2.172 J2.173 | length 244.7
  BOT w4: v1(2162.2,6948.11) 2173.71,6948.11 J2.163@2187.21,6961.61 ; v1(2162.2,7098.11) 2173.71,7098.11 J2.166@2187.21,7111.61 ; v1(2162.2,7248.11) 2173.71,7248.11 J2.169@2187.21,7261.61 ; J2.162@2187.21,6911.61 2200.71,6898.11 v1(2200.7,6886.61) ; J2.165@2187.21,7061.61 2200.71,7048.11 v1(2200.7,7036.61) ; J2.168@2187.21,7211.61 2200.71,7198.11 v1(2200.7,7186.61) ; v1(2212.2,6948.11) 2223.71,6948.11 J2.173@2237.21,6961.61 ; J2.172@2237.21,6911.61 2250.71,6898.11 v1(2250.7,6886.61)
VTTREF_R_T: J1.162 J1.163 J1.165 J1.166 J1.168 J1.169 J1.172 J1.173 | length 244.7
  BOT w4: v1(5611.81,7248.11) 5623.32,7248.11 J1.172@5636.81,7261.61 ; J1.173@5636.81,7211.61 5650.31,7198.12 v1(5650.31,7186.62) ; v1(5661.81,6948.11) 5673.31,6948.11 J1.168@5686.81,6961.61 ; v1(5661.81,7098.11) 5673.31,7098.11 J1.165@5686.81,7111.61 ; v1(5661.81,7248.11) 5673.32,7248.11 J1.162@5686.81,7261.61 ; J1.169@5686.81,6911.61 5700.32,6898.11 v1(5700.31,6886.61) ; J1.166@5686.81,7061.61 5700.31,7048.11 v1(5700.31,7036.61) ; J1.163@5686.81,7211.61 5700.31,7198.11 v1(5700.31,7186.61)
pads on no net: J1.119 J1.122 J1.123 J1.125 J1.126 J1.128 J1.129 J1.132 J1.133 J1.135 J1.136 J1.138 J1.139 J1.142 J1.143 J1.145 J1.146 J1.148 J1.149 J1.319 J1.401 J1.402 J2.39 J2.122 J2.123 J2.125 J2.126 J2.128 J2.129 J2.132 J2.133 J2.135 J2.136 J2.138 J2.139 J2.142 J2.143 J2.145 J2.146 J2.148 J2.149 J2.152 J2.153 J2.155 J2.156 J2.158 J2.159 J2.319 J2.322 J2.323 J2.325 J2.326 J2.328 J2.329 J2.332 J2.333 J2.335 J2.336 J2.338 J2.339 J2.342 J2.343 J2.345 J2.346 J2.348 J2.349 J2.352 J2.353 J2.355 J2.356 J2.358 J2.359 J2.362 J2.363 J2.365 J2.366 J2.368 J2.369 J2.372 J2.373 J2.375 J2.376 J2.378 J2.379 J2.382 J2.383 J2.385 J2.386 J2.388 J2.389 J2.392 J2.393 J2.395 J2.396 J2.398 J2.399 J2.401 J2.402
copper on no net: | length 26143.5
  BOT w4: 1387.21,7061.61 1368.21,7080.61 1352.59,7080.61 1313.65,7041.68 1313.65,6963.32 1338.49,6938.49 1342,6934.97 1342,6877 1328,6863 1310.03,6863 1306.52,6866.51 1255,6918.03 1255,6973 ccw(c1250,6973) 1250,6978 ccw(c1250,6972) 1244,6972 1244,6912.97 1382.68,6774.29 1400,6774.29 ccw(c1400,6779.29) 1405,6779.29 1405,6805 cw(c1410,6805) 1410,6810 cw(c1410,6805) 1415,6805 1415,6779.29 ccw(c1420,6779.29) 1420,6774.29 6077.32,6774.29 6085,6781.97 6085,6790 6077,6798 ; 1387.21,7111.61 1368.21,7092.61 1347.61,7092.61 1301.65,7046.65 1301.65,6958.35 1330,6930 1330,6881.97 1323.03,6875 1315,6875 1267,6923 1267,6973 ccw(c1250,6973) 1250,6990 ccw(c1250,6972) 1232,6972 1232,6908 1377.71,6762.29 6082.29,6762.29 6097,6777 6097,6790 6105,6798 ; 2512.21,6948.11 2523.71,6948.11 2537.21,6961.61 ; 2512.21,7098.11 2523.71,7098.11 2537.21,7111.61 ; 2512.21,7248.11 2523.71,7248.11 2537.21,7261.61 ; 2537.21,6911.61 2550.71,6898.11 2550.71,6886.61 ; 2537.21,7211.61 2550.71,7198.11 2550.71,7186.61 ; 2562.21,7098.11 2573.71,7098.11 2587.21,7111.61 ; 2662.21,7098.11 2673.71,7098.11 2687.21,7111.61 ; 2687.21,7061.61 2700.71,7048.11 2700.71,7036.61 ; 2712.21,6948.11 2723.71,6948.11 2737.21,6961.61 ; 2712.21,7098.11 2723.71,7098.11 2737.21,7111.61 ; 2737.21,7061.61 2750.71,7048.11 2750.71,7036.61 ; 2762.21,7098.11 2773.71,7098.11 2787.21,7111.61 ; 2762.21,7248.11 2773.71,7248.11 2787.21,7261.61 ; 2787.21,7211.61 2800.71,7198.11 2800.71,7186.61 ; 2862.21,7098.11 2873.71,7098.11 2887.21,7111.61 ; 2862.21,7248.11 2873.71,7248.11 2887.21,7261.61 ; 2887.21,7061.61 2900.71,7048.11 2900.71,7036.61 ; 2887.21,7211.61 2900.71,7198.11 2900.71,7186.61 ; 2920,7090 2920,7094.41 2937.21,7111.61 ; 2937.21,7061.61 2950.71,7048.11 2950.71,7036.61 ; 2937.21,7211.61 2950.71,7198.11 2950.71,7186.61 ; 3581,6865 ccw(c3591,6865) 3581,6864.94 ; 3601,6865 cw(c3591,6865) 3601,6864.94 ; 3645,6865 ccw(c3655,6865) 3645,6864.94 ; 3654.57,7308.43 3645,7318 3595,7318 ccw(c3595,7304) 3581,7304 3581,6864.94 ; 3654.57,7338.43 3646.13,7330 3595,7330 ccw(c3595,7304) 3569,7304 3569,6865 ccw(c3591,6865) 3613,6865 3613,7255 cw(c3623,7255) 3633,7255 3633,6865 ccw(c3655,6865) 3677,6865 3677,7255 cw(c3687,7255) 3697,7255 3697,6865 ccw(c3719,6865) 3741,6865 3741,7255 cw(c3751,7255) 3761,7255 3761,6865 ccw(c3783,6865) 3805,6865 3805,7255 cw(c3815,7255) 3815,7265 3940.15,7265 4124.53,7080.61 4503.31,7080.61 4522.31,7061.61 4536.81,7061.61 ; 3665,6865 cw(c3655,6865) 3665,6864.94 ; 3709,6865 ccw(c3719,6865) 3709,6864.94 ; 3729,6865 cw(c3719,6865) 3729,6864.94 ; 3773,6865 ccw(c3783,6865) 3773,6864.94 ; 3793,6865 cw(c3783,6865) 3793,6864.94 ; 4178,7312 4170,7304 4121,7304 cw(c4121,7316) 4109,7316 4109,7447 ccw(c4087,7447) 4087,7469 ccw(c4087,7447) 4065,7447 4065,7285 cw(c4055,7285) 4055,7275 cw(c4055,7283) 4047,7283 4047,7445 ccw(c4025,7445) 4025,7467 ccw(c4025,7445) 4003,7445 4003,7260 ccw(c4023,7260) 4023,7240 4130,7240 cw(c4130,7230) 4140,7230 cw(c4132,7230) 4132,7222 4065,7222 ccw(c4065,7205) 4048,7205 4048,7202 ccw(c4065,7202) 4065,7185 4125,7185 cw(c4125,7172) 4138,7172 4138,7135 ccw(c4165,7135) 4165,7108 ccw(c4165,7133) 4190,7133 4190,7160 cw(c4200,7160) 4200,7170 cw(c4200,7159) 4211,7159 4211,7131 ccw(c4233,7131) 4255,7131 4255,7261 cw(c4265,7261) 4275,7261 4275,7131 ; 4275,7130 4275,7131 ; 4319,7130 4319,7346 cw(c4329,7346) 4339,7346 4339,7131 ccw(c4361,7131) 4383,7131 ; 4319,7131 cw(c4297,7131) 4275,7131 ; 4383,7130 4383,7346 cw(c4393,7346) 4403,7346 4403,7130 ccw(c4425,7130) 4425,7108 ccw(c4425,7130) 4447,7130 4447,7520 cw(c4457,7520) 4467,7520 4467,7458.4 ccw(c4487.4,7458.4) 4487.4,7438 4610,7438 cw(c4610,7428) 4610,7418 4489,7418 ccw(c4489,7396) 4467,7396 4467,7320.21 4467,7253.61 ccw(c4490,7253.61) 4490,7230.61 4503.31,7230.61 4522.31,7211.61 4536.81,7211.61 ; 4536.81,7111.61 4522.31,7111.61 4503.31,7092.61 4129.51,7092.61 3945.12,7277 3908,7277 cw(c3908,7285) 3900,7285 3900,7295 ccw(c3895,7295) 3895,7300 ccw(c3895,7295) 3890,7295 3890,7287 cw(c3885,7287) 3885,7282 cw(c3885,7287) 3880,7287 3880,7295 ccw(c3875,7295) 3875,7300 ccw(c3875,7295) 3870,7295 3870,7282 cw(c3865,7282) 3865,7277 3815,7277 ccw(c3815,7255) 3793,7255 3793,6864.94 ; 4561.81,7072.68 4561.81,7086.61 4586.81,7111.61 ; 4586.82,7061.61 4600.32,7048.11 4600.32,7036.61 ; 4686.81,7061.61 4700.31,7048.11 4700.31,7036.61 ; 4711.81,7248.11 4723.31,7248.11 4736.81,7261.61 ; 4723.31,6936.61 4723.31,6925.11 4736.81,6911.61 ; 4736.81,6961.61 4750.31,6975.11 4761.81,6975.11 ; 4736.81,7061.61 4750.31,7048.11 4750.31,7036.61 ; 4736.81,7211.61 4750.31,7198.11 4750.31,7186.61 ; 4924.57,7035.43 4924.57,7040.57 4923.32,7041.82 4920.75,7039.25 4915.66,7044.34 4915.66,7090.45 4936.82,7111.61 ; 4936.81,6961.62 4962.41,6936.02 4962.6,6936.02 ; 4936.82,7061.61 4960,7038.43 ; 4961.82,7098.11 4973.32,7098.11 4986.82,7111.61 ; 4986.82,6911.61 5000.32,6898.11 5000.32,6886.61 ; 4986.81,6961.61 5000,6974.8 5000,6985 ; 4986.81,7061.61 4986.81,7076.38 4997.05,7086.61 5002.95,7086.61 ; 5061.81,6948.11 5073.31,6948.11 5086.81,6961.61 ; 5086.81,6911.61 5100.31,6898.11 5100.31,6886.61 ; 5086.81,7061.61 5100.31,7048.11 5100.31,7036.61 ; 6061.82,7098.11 6073.32,7098.11 6086.82,7111.61 ; 6086.82,7061.61 6100.32,7048.11 6100.32,7036.61 ; 3581,6864.94 ccw(c3591,6865) 3601,6864.94 ; 3601,6864.94 3601,7255 cw(c3623,7255) 3645,7255 3645,6864.94 ; 3645,6864.94 ccw(c3655,6865) 3665,6864.94 ; 3665,6864.94 3665,7255 cw(c3687,7255) 3709,7255 3709,6864.94 ; 3709,6864.94 ccw(c3719,6865) 3729,6864.94 ; 3729,6864.94 3729,7255 cw(c3751,7255) 3773,7255 3773,6864.94 ; 3773,6864.94 ccw(c3783,6865) 3793,6864.94
  BOT w10: 1587.21,7161.61 v1(1605.59,7143.23) ; v1(2073.7,7036.61) 2073.71,7025.11 2087.21,7011.61 ; v1(2123.7,7036.61) 2123.71,7025.11 2137.21,7011.61 ; v1(2173.7,7036.61) 2173.71,7025.11 2187.21,7011.61 ; v1(2223.7,7036.61) 2223.71,7025.11 2237.21,7011.61 ; v1(2273.7,7036.61) 2273.71,7025.11 2287.21,7011.61 ; v1(2323.7,7036.61) 2323.71,7025.11 2337.21,7011.61 ; v1(2373.7,7036.61) 2373.71,7025.11 2387.21,7011.61 ; v1(2423.7,7036.61) 2423.71,7025.11 2437.21,7011.61 ; v1(2473.7,7036.61) 2473.71,7025.11 2487.21,7011.61 ; v1(2523.7,7036.61) 2523.71,7025.11 2537.21,7011.61 ; v1(2573.7,7036.61) 2573.71,7025.11 2587.21,7011.61 ; v1(2623.7,7036.61) 2623.71,7025.11 2637.21,7011.61 ; v1(2673.7,7036.61) 2673.71,7025.11 2687.21,7011.61 ; v1(2723.7,7036.61) 2723.71,7025.11 2737.21,7011.61 ; v1(2773.7,7036.61) 2773.71,7025.11 2787.21,7011.61 ; v1(2823.7,7036.61) 2823.71,7025.11 2837.21,7011.61 ; v1(2873.7,7036.61) 2873.71,7025.11 2887.21,7011.61 ; v1(2923.7,7036.61) 2923.71,7025.11 2937.21,7011.61 ; v1(2973.7,7036.61) 2973.71,7025.11 2987.21,7011.61 ; v1(3023.7,7036.61) 3023.71,7025.11 3037.21,7011.61 ; v1(3073.7,7036.61) 3073.71,7025.11 3087.21,7011.61 ; v1(3123.7,7036.61) 3123.71,7025.11 3137.21,7011.61 ; v1(3173.7,7036.61) 3173.71,7025.11 3187.21,7011.61 ; v1(3223.7,7036.61) 3223.71,7025.11 3237.21,7011.61 ; v1(3273.7,7036.61) 3273.71,7025.11 3287.21,7011.61 ; v1(5773.31,6886.61) 5773.32,6875.11 5786.82,6861.61

## Polygon pours and split planes (outlines as drawn)
VIOREF_L_T on S3(V12/V2V5) "S4(VDDR)-No Net" (solid, pour order 1666): 2537.51,6637.51 2537.51,7414.61 2447,7500 2162.51,7500 2162.51,7284.73 2212.51,7234.73 2212.51,6984.73 2212.51,6934.73 2312.51,6834.73 2312.51,6637.49 2350,6600 2500,6600
VTTREF_L_T on S3(V12/V2V5) "S4(VDDR)-No Net" (solid, pour order 1664): 2267.15,6667.15 2267.15,6878.69 2217.15,6928.69 2217.15,7202.12 2217.15,7227.12 2167.15,7277.12 2167.15,7500 2000,7500 1950,7450 1950,6650 2000,6600 2200,6600
VTTREF_R_T on S3(V12/V2V5) "S4(VDDR)-No Net" (solid, pour order 1662): 5600,7450 5600,7248.43 5650,7198.43 5650,6925 5650,6900 5700,6850 5700,6600 5850,6600 5950,6700 5950,7400 5850,7500 5650,7500
VIOREF_R_T on S3(V12/V2V5) "S4(VDDR)-No Net" (solid, pour order 1660): 5325,7475 5325,6673.58 5403,6600 5700,6600 5700,6850 5650,6900 5650,7150 5650,7200 5550,7300 5550,7450 5500,7500 5350,7500
V48BB on S4(VDDR) "S4(VDDR)-No Net" (solid, pour order 1658): 5150,7800 5150,6500 5150,6350 5300,6200 6600,6200 7000,6600 7000,6900 7100,7000 7400,7000 7450,7050 7450,7200 7350,7300 7150,7300 7100,7300 7000,7400 7000,7750 6900,7850 5200,7850
no net on P1(GND) (split plane): 7863.93,5325.05 10.09,5325.05 10.09,7672.99 201.03,7863.93 7863.93,7863.93
no net on P2(GND) (split plane): 7863.93,5325.05 10.09,5325.05 10.09,7672.99 201.03,7863.93 7863.93,7863.93
no net on P3(GND) (split plane): 7863.93,5325.05 10.09,5325.05 10.09,7672.99 201.03,7863.93 7863.93,7863.93
no net on P4(GND) (split plane): 7863.93,5325.05 10.09,5325.05 10.09,7672.99 201.03,7863.93 7863.93,7863.93
no net on P5(GND) (split plane): 7863.93,5325.05 10.09,5325.05 10.09,7672.99 201.03,7863.93 7863.93,7863.93
no net on P6(GND) (split plane): 7863.93,5325.05 10.09,5325.05 10.09,7672.99 201.03,7863.93 7863.93,7863.93

## Silkscreen, mask and mechanical layers (free items; w line width, h text height)
Top Overlay:
  text "SIGJUMPER-TOP REV. 2" at 1574.8,6023.62 h250
  text "Signal Laboratories" at 1574.8,5787.4 h250
  text "Jan 2017" at 1574.8,5551.18 h250
Mechanical 1:
  lines w7.87: 2263.78,7086.61 2460.63,7086.61 ; 2362.2,6988.19 2362.2,7185.04 ; 5413.39,7086.61 5610.24,7086.61 ; 5511.81,6988.19 5511.81,7185.04
Mechanical 2:
  the board outline again, w10
Mechanical 16:
  lines w5: -500,1825 -300,1825 ; -500,3950 -300,3950 ; -500,6075 -300,6075 ; 2250,-300 2250,-100 ; 2250,8000 2250,8200 ; 3000,-100 3000,1100 4400,1100 ; 3000,740 4400,740 ; 3050,610 3450,610 ; 3265,330 3295,330 ; 3265,355 3295,355 ; 3265,430 3295,430 ; 3265,455 3295,455 ; 3265,530 3295,530 ; 3265,555 3295,555 ; 5000,-300 5000,-100 ; 5000,8000 5000,8200 ; 5800,200 10300,200 ; 5800,500 10300,500 ; 5800,800 7300,800 ; 5800,7600 10300,7600 ; 5800,7800 10300,7800 ; 5800,8000 5800,7400 10300,7400 ; 6400,7400 6400,8000 ; 6900,7400 6900,8000 ; 7300,-100 7300,500 7300,1100 ; 7750,-300 7750,-100 ; 7750,8000 7750,8200 ; 9400,-100 9400,500 ; 9675,7400 9675,8000 ; 10300,1825 10500,1825 ; 10300,3950 10500,3950 ; 10300,6075 10500,6075 ; 4400,1100 5800,1100 ; 4400,1100 4400,-100 5800,-100 ; 5800,-100 5800,1100 ; 5800,-100 10300,-100 ; 5800,1100 7300,1100 ; 7300,1100 10300,1100 10300,-100 ; 10300,-100 10300,8000 -300,8000 -300,-100 10300,-100 ; -500,-300 -500,8200 10500,8200 10500,-300 -500,-300
  lines w7: 3280,340 3280,370 ; 3280,440 3280,470 ; 3280,540 3280,570
  text "1" at 851.34,8065 h70
  text "2" at 3602,8065 h70
  text "3" at 6347,8065 h70
  text "4" at 9098.01,8065 h70
  text "REV" at 5850,7850 h66.93
  text "DATE" at 6450,7850 h66.93
  text "DESC" at 6950,7850 h66.93
  text "ENG" at 9750,7850 h66.93
  text "1" at 5850,7650 h66.93
  text "*" at 6450,7650 h66.93
  text "INITIAL RELEASE" at 6950,7650 h66.93
  text "*" at 9750,7650 h66.93
  text "A" at -425,7047 h70
  text "A" at 10375,7047 h70
  text "B" at -425,4922 h70
  text "B" at 10375,4922 h70
  text "C" at -425,2797 h70
  text "C" at 10375,2797 h70
  text "ENGINEER:" at 5850,1000 h45
  text "TITLE:" at 7350,1000 h45
  text "ALL DIMENSIONS ARE IN MM (INCHES)" at 3075,925 h47.24
  text "Signal Laboratories, Inc." at 4500,925 h70
  text "J. Brinton" at 5850,875 h70
  text "3479 Edison Way" at 4500,825 h70
  text "TOLERANCES:" at 3510,760 h47.24
  text "Menlo Park, CA 94025" at 4500,725 h70
  text "Copper Suicide" at 7375,725 h86.61
  text "PCB DESIGNER:" at 5850,705 h45
  text "D" at -425,677 h70
  text "D" at 10375,677 h70
  text "DECIMALS" at 3075,650 h47.24
  text "+1 (877) 778-8435" at 4500,625 h70
  text "J. Brinton" at 5850,575 h70
  text ".X     0.1" at 3075,525 h47.24
  text ".XX    0.05" at 3075,425 h47.24
  text "DATE:" at 5850,400 h45
  text "PART NO.:" at 7350,400 h45
  text "REV:" at 9450,400 h45
  text ".XXX   0.005" at 3075,325 h47.24
  text "1/1/2017" at 5850,275 h66.93
  text "-" at 7350,275 h70
  text "1" at 9450,275 h70
  text "*UNLESS OTHERWISE NOTED" at 3050,100 h47.24
  text "FILE NAME:" at 5850,100 h45
  text "DWG NO:" at 7350,100 h45
  text "SCALE:" at 9450,100 h45
  text ".PCB_FILE_NAME_NO_PATH" at 5900,-20 h70
  text "-" at 7350,-25 h70
  text "1:1" at 9450,-25 h70
  text "1" at 851.34,-235 h70
  text "2" at 3602,-235 h70
  text "3" at 6347,-235 h70
  text "4" at 9098.01,-235 h70
Drill Drawing:
  text "1. FINISHED: ENIG" at 932.68,4926.47 h45
  text "2. SOLDERMASK: GREEN" at 932.68,4826.47 h45
  text "3. SILKSCREEN: WHITE" at 932.68,4726.47 h45
  text ".Legend" at 2047.24,4173.23 h47.24
Mechanical 29:
  the board outline again, w22
Mechanical 32:
  lines w5: -500,1825 -300,1825 ; -500,3950 -300,3950 ; -500,6075 -300,6075 ; -300,200 4200,200 ; -300,500 4200,500 ; -300,7400 4200,7400 4200,8000 ; -300,7600 4200,7600 ; -300,7800 4200,7800 ; 325,7400 325,8000 ; 600,-100 600,500 ; 2250,-300 2250,-100 ; 2250,8000 2250,8200 ; 2700,-100 2700,500 2700,1100 ; 2700,800 4200,800 ; 3100,7400 3100,8000 ; 3600,7400 3600,8000 ; 5000,-300 5000,-100 ; 5000,8000 5000,8200 ; 5600,740 7000,740 ; 6550,610 6950,610 ; 6705,330 6735,330 ; 6705,355 6735,355 ; 6705,430 6735,430 ; 6705,455 6735,455 ; 6705,530 6735,530 ; 6705,555 6735,555 ; 7000,-100 7000,1100 5600,1100 ; 7750,-300 7750,-100 ; 7750,8000 7750,8200 ; 10300,1825 10500,1825 ; 10300,3950 10500,3950 ; 10300,6075 10500,6075 ; -300,-100 -300,8000 10300,8000 10300,-100 -300,-100 ; -300,-100 -300,1100 2700,1100 ; -300,-100 4200,-100 ; 2700,1100 4200,1100 ; 4200,-100 4200,1100 ; 4200,-100 5600,-100 5600,1100 ; 4200,1100 5600,1100 ; -500,-300 -500,8200 10500,8200 10500,-300 -500,-300
  lines w7: 6720,340 6720,370 ; 6720,440 6720,470 ; 6720,540 6720,570
  text "4" at 901.99,8065 h70
  text "3" at 3653,8065 h70
  text "2" at 6398,8065 h70
  text "1" at 9148.66,8065 h70
  text "ENG" at 250,7850 h66.93
  text "DESC" at 3050,7850 h66.93
  text "DATE" at 3550,7850 h66.93
  text "REV" at 4150,7850 h66.93
  text "*" at 250,7650 h66.93
  text "INITIAL RELEASE" at 3050,7650 h66.93
  text "*" at 3550,7650 h66.93
  text "1" at 4150,7650 h66.93
  text "A" at -375,7047 h70
  text "A" at 10425,7047 h70
  text "B" at -375,4922 h70
  text "B" at 10425,4922 h70
  text "C" at -375,2797 h70
  text "C" at 10425,2797 h70
  text "TITLE:" at 2650,1000 h45
  text "ENGINEER:" at 4150,1000 h45
  text "Signal Laboratories, Inc." at 5500,925 h70
  text "ALL DIMENSIONS ARE IN MM (INCHES)" at 6925,925 h47.24
  text "J. Brinton" at 4150,875 h70
  text "3479 Edison Way" at 5500,825 h70
  text "TOLERANCES:" at 6490,760 h47.24
  text "Copper Suicide" at 2625,725 h86.61
  text "Menlo Park, CA 94025" at 5500,725 h70
  text "PCB DESIGNER:" at 4150,705 h45
  text "D" at -375,677 h70
  text "D" at 10425,677 h70
  text "DECIMALS" at 6925,650 h47.24
  text "(858) 414 1421" at 5500,625 h70
  text "J. Brinton" at 4150,575 h70
  text ".X     0.1" at 6925,525 h47.24
  text ".XX    0.05" at 6925,425 h47.24
  text "REV:" at 550,400 h45
  text "PART NO.:" at 2650,400 h45
  text "DATE:" at 4150,400 h45
  text ".XXX   0.005" at 6925,325 h47.24
  text "1" at 550,275 h70
  text "-" at 2650,275 h70
  text "1/1/2017" at 4150,275 h66.93
  text "SCALE:" at 550,100 h45
  text "DWG NO:" at 2650,100 h45
  text "FILE NAME:" at 4150,100 h45
  text "*UNLESS OTHERWISE NOTED" at 6950,100 h47.24
  text ".PCB_FILE_NAME_NO_PATH" at 4100,-20 h70
  text "1:1" at 550,-25 h70
  text "-" at 2650,-25 h70
  text "4" at 901.99,-235 h70
  text "3" at 3653,-235 h70
  text "2" at 6398,-235 h70
  text "1" at 9148.66,-235 h70